# EAGLE board MJ828 - rev.3 - TCAN334 - poc (EAGLE 9.6.2)
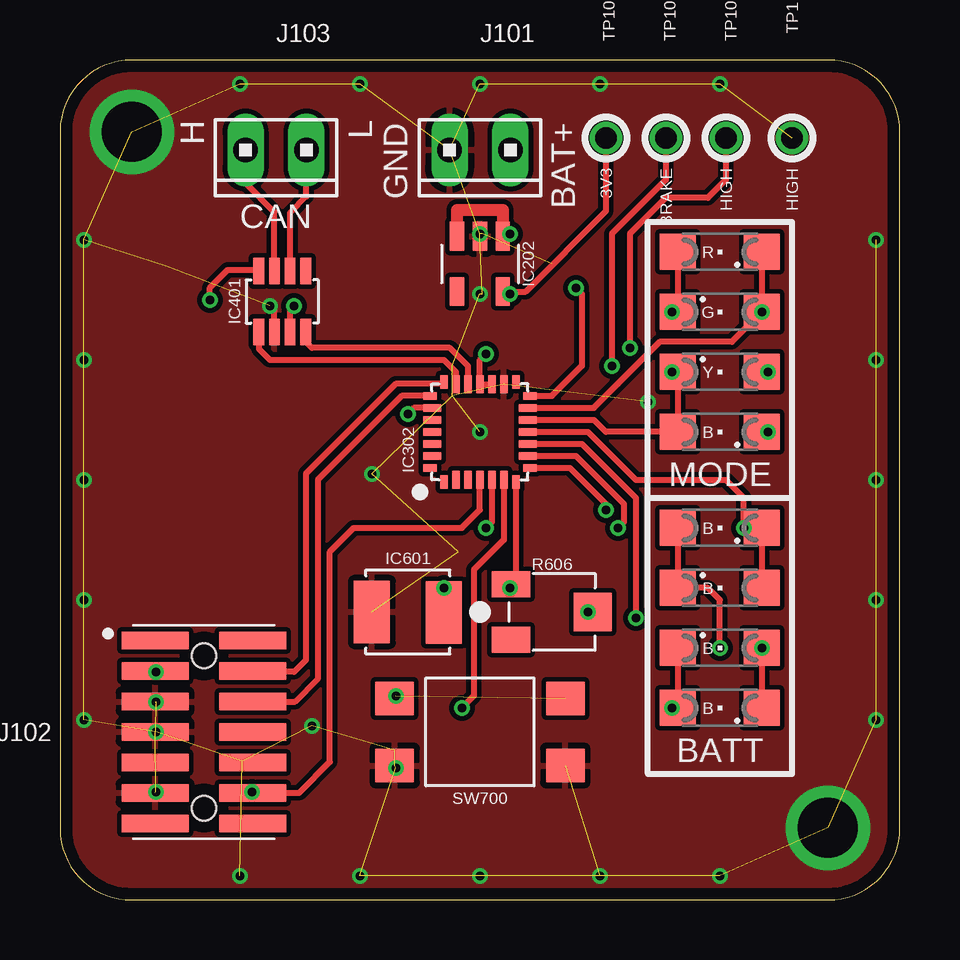
[diagram p0: board, top side]
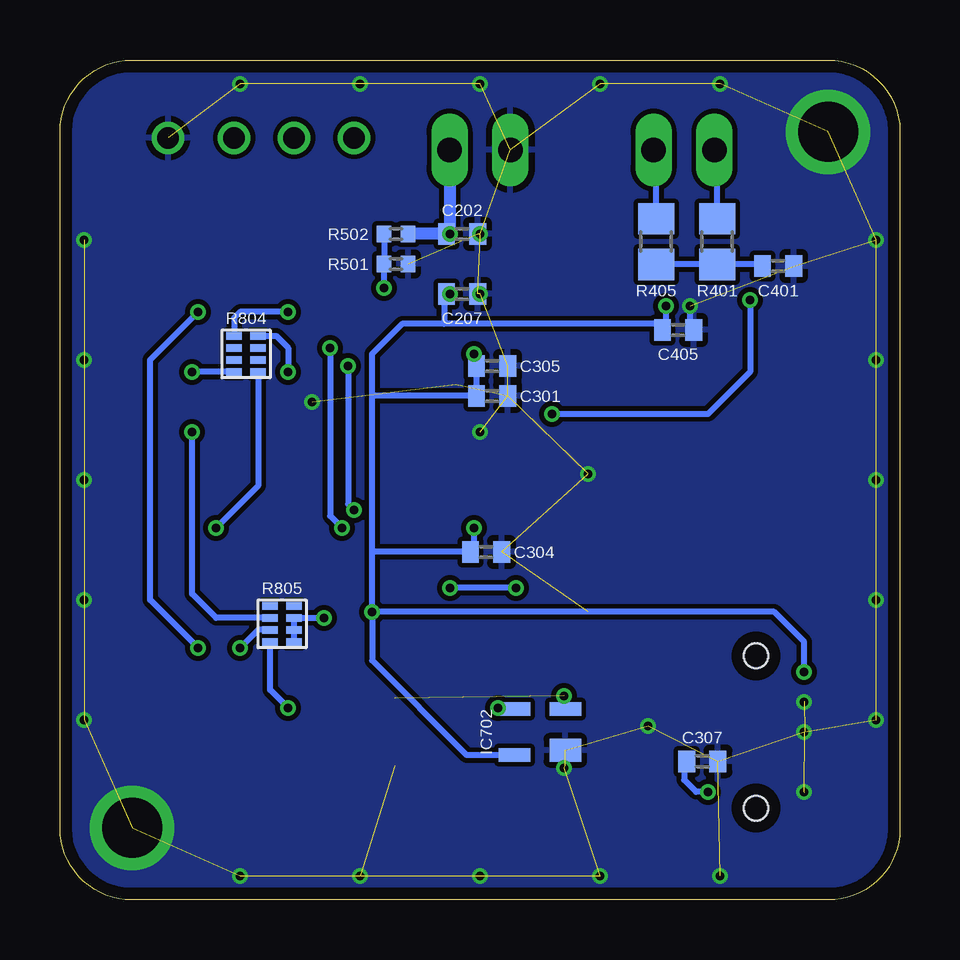
[diagram p1: board, bottom side, seen from below]

Size 35 x 35 mm. Coordinates in mm from the lower left corner, seen from the top.
Outline: 32,35 3,35 arc89 0,32.05 0,2.95 arc90 3,0 32,0 arc90 35,3 35,32 arc90 32,35
Copper layers (1*16): Top 0.035mm / dielectric 1.5mm / Bottom 0.035mm
Design rules "markovac_2layer": minimum track width 0.2mm, minimum drill 0.35mm, track to track 0.2mm, track to pad 0.2mm, pad to pad 0.2mm, via to via 0.2mm, smd to smd 0.2mm, copper to edge 0.5mm, drill to drill 8mil, minimum pad ring 0.15mm, minimum via ring 0.15mm, stop-mask expansion 4mil, vias tented up to drill 0.35mm, thermal gap 10mil
Net classes: 0 GND: width 0.25 mm, drill 0.35 mm, clearance 0.19 mm; 1 BAT+: width 0.5 mm, drill 0.35 mm, clearance 0.19 mm; 3 signal: width 0.25 mm, drill 0.35 mm, clearance 0.19 mm; 4 3V3: width 0.25 mm, drill 0.35 mm, clearance 0.19 mm

## Footprints (pad centres in the part's own frame; a part is rotated, then mirrored left to right if it is on the bottom)
C0402 = smd 0.7 x 0.9: 1 -0.65,0; 2 0.65,0
SOT-23-5L = smd 0.6 x 1.2: ADJ/NC -0.95,-1.15; EN -0.95,1.15; GND 0,1.15; IN 0.95,1.15; OUT 0.95,-1.15
UFQFPN-28 = smd 0.55 x 0.3: 1_PB8 -2.08,1.5; 7_PA1 -2.08,-1.5; 15_PB1 2.08,-1.5; 21_PA13 2.08,1.5 | smd 0.75 x 0.3: 2_PF0 -1.98,1; 3_PF1 -1.98,0.5; 4_NRST -1.98,0; 5_VDDA -1.98,-0.5; 6_PA0 -1.98,-1; 16_VSS 1.98,-1; 17_VDD 1.98,-0.5; 18_VDDIO2 1.98,0; 19_PA9-[PA11] 1.98,0.5; 20_PA10-[PA12] 1.98,1 | smd 0.3 x 0.55: 8_PA2 -1.5,-2.08; 14_PB0 1.5,-2.08; 22_PA14 1.5,2.08; 28_PB7 -1.5,2.08 | smd 0.3 x 0.75: 9_PA3 -1,-1.98; 10_PA4 -0.5,-1.98; 11_PA5 0,-1.98; 12_PA6 0.5,-1.98; 13_PA7 1,-1.98; 23_PA15 1,1.98; 24_PB3 0.5,1.98; 25_PB4 0,1.98; 26_PB5 -0.5,1.98; 27_PB6 -1,1.98
SOT23-8 = smd 0.45 x 1.1: P$1 -0.975,-1.275; P$2 -0.325,-1.275; P$3 0.325,-1.275; P$4 0.975,-1.275; P$5 0.975,1.275; P$6 0.325,1.275; P$7 -0.325,1.275; P$8 -0.975,1.275
P-LCC-2 = smd 2.6 x 1.5: COLLECTOR -0.02,-1.5; EMITTER 0,1.5
4SOT143 = smd 0.94 x 1.31: 1_GND -0.76,-1.06 | smd 0.55 x 1.31: 2_IN 0.96,-1.06; 3_OUT 0.96,1.06; 4_VCC -0.96,1.06
10X02MTA = drill 1.016 long: 1 1.27,0; 2 -1.27,0
FTSH10701LDVKA = smd 0.74 x 2.79: 1 -3.81,-2.035; 2 -3.81,2.035; 3 -2.54,-2.035; 4 -2.54,2.035; 5 -1.27,-2.035; 6 -1.27,2.035; 7 0,-2.035; 8 0,2.035; 9 1.27,-2.035; 10 1.27,2.035; 11 2.54,-2.035; 12 2.54,2.035; 13 3.81,-2.035; 14 3.81,2.035 | hole 1.02: -3.175,0; 3.175,0
SML1206 = smd 1.5 x 1.5: A 1.75,0; C -1.75,0
R0805 = smd 1.3 x 1.5: 1 -0.95,0; 2 0.95,0
R0402 = smd 0.6 x 0.7: 1 -0.5,0; 2 0.5,0
3313 = smd 1.1 x 1.6: 1_CCW 1.155,-1.7; 3_CW -1.155,-1.7 | smd 1.6 x 1.6: 2_WIPER 0,1.7
0402 = smd 0.65 x 0.3: 1 -0.5,-0.75; 2 0.5,-0.75; 3 -0.5,-0.25; 4 0.5,-0.25; 5 -0.5,0.25; 6 0.5,0.25; 7 -0.5,0.75; 8 0.5,0.75
SMD = smd 1.6 x 1.4: 1 -3.556,-1.397; 2 3.556,-1.397; 3 -3.556,1.397; 4 3.556,1.397
TH-0.9 = drill 0.9: P$1 0,0

## Placement (x,y rotation side)
C202  1uF / 10V  [C0402]  18.25,27.75 0 bottom
C207  1uF / 10V  [C0402]  18.25,25.25 180 bottom
C301  0.1uF / 10V  [C0402]  17,21 180 bottom
C304  1uF / 10V  [C0402]  17.25,14.5 180 bottom
C305  0.1uF / 10V  [C0402]  17,22.25 180 bottom
C307  0.1uF / 10V  [C0402]  8.24,5.78 180 bottom
C401  47nF / 10V  [C0402]  5.08,26.42 0 bottom
C405  0.1uF / 10V  [C0402]  9.25,23.75 0 bottom
IC202  LDK320AM33R  [SOT-23-5L]  17.5,26.5 0 top
IC302  STM32F042G6U6  [UFQFPN-28]  17.5,19.5 90 top
IC401  TCAN334  [SOT23-8]  9.26,24.94 0 top
IC601  SFH 320 FA-Z  [P-LCC-2]  14.5,12 90 top
IC702  MAX6816EUS+T  [4SOT143]  15,7 90 bottom
J101  Power Supply  [10X02MTA]  17.5,31.25 180 top
J102  FTSH-107-01-L-DV-K-A  [FTSH10701LDVKA]  6,7 270 top
J103  CAN  [10X02MTA]  9,31.25 180 top
LED_BATT801  156120BS82500  [SML1206]  27.5,15.5 180 top
LED_BATT802  156120BS82500  [SML1206]  27.5,13 0 top
LED_BATT803  156120BS82500  [SML1206]  27.5,10.5 0 top
LED_BATT804  156120BS82500  [SML1206]  27.5,8 180 top
LED_BLUE800  156120BS82500  [SML1206]  27.5,19.5 180 top
LED_GREEN800  156120VS82500  [SML1206]  27.5,24.5 0 top
LED_RED800  156120RS82500  [SML1206]  27.5,27 180 top
LED_YELLOW800  156120YS82500  [SML1206]  27.5,22 0 top
R401  60  [R0805]  7.62,27.43 90 bottom
R405  60  [R0805]  10.16,27.43 270 bottom
R501  100k 0.1%  [R0402]  21,26.5 180 bottom
R502  300k 0.1%  [R0402]  21,27.75 0 bottom
R606  3313J-1-104E - 100k  [3313]  20.5,12 270 top
R804  741X083151JP / 150Ω  [0402]  27.25,22.75 0 bottom
R805  741X083101JP / 100Ω  [0402]  25.75,11.5 0 bottom
SW700  TL3305CF160QG  [SMD]  17.5,7 180 top
TP1  CAN low  [TH-0.9]  30.5,31.75 0 top
TP102  CAN low  [TH-0.9]  22.75,31.75 0 top
TP104  CAN low  [TH-0.9]  25.25,31.75 0 top
TP105  CAN low  [TH-0.9]  27.75,31.75 0 top

## Library data of the parts
C202 C207 C301 C304 C305 C307 C401 C405 = rcl; SPICEPREFIX: C
IC202 = LDK320 5V LDO
IC302 = STM32F042G6
IC401 = TCAN33x - 3.3V CAN Transciever
IC601 = SFH 320 FA - IR Phototransistor
IC702 = MAX6818 CMOS Switch debouncer
J101 J103 = con-amp
J102 = STM32 JTAG 1.27mm 14pin header; DESCRIPTION: Headers & Wire Housings .050" Micro Terminal Strip; HEIGHT: 5.97mm; MANUFACTURER_NAME: SAMTEC; MANUFACTURER_PART_NUMBER: FTSH-107-01-L-DV-K-A; MOUSER_PART_NUMBER: 200-FTSH10701LDVKA; MOUSER_PRICE-STOCK: https://www.mouser.com/Search/Refine.aspx?Keyword=200-FTSH10701LDVKA
LED_BATT801-LED_BATT804 LED_BLUE800 LED_GREEN800 LED_RED800 LED_YELLOW800 = led
R401 R405 R501 R502 = rcl; SPICEPREFIX: R
R606 = 3313 - Trim Poti
R804 R805 = 741X083331JP Resistor Array
SW700 = TL3305-844809 SPST-NO Tact Switch
TP1 TP102 TP104 TP105 = signal testpoint

## Nets
3V3 [3V3]: C207.2 C301.2 C304.2 C305.2 C405.1 IC202.OUT IC302.5_VDDA IC302.17_VDD IC302.18_VDDIO2 IC401.P$3 IC702.4_VCC J102.3 R606.2_WIPER TP102.P$1
!STBY! [signal]: IC302.23_PA15 IC401.P$8
BAT+ [BAT+]: C202.1 IC202.EN IC202.IN J101.2 R502.2
BREAK_IN [signal]: IC302.8_PA2 TP104.P$1
CAN_H [signal]: IC401.P$7 J103.1 R401.2
CAN_INFRA:SPLIT [signal]: C401.1 R401.1 R405.2
CAN_L [signal]: IC401.P$6 J103.2 R405.1
CAN_RX [signal]: IC302.19_PA9-[PA11] IC401.P$4
CAN_TX [signal]: IC302.20_PA10-[PA12] IC401.P$1
CP1 [signal]: IC302.13_PA7 LED_BATT803.A LED_BATT804.C LED_GREEN800.A LED_RED800.C
CP2 [signal]: IC302.12_PA6 LED_BLUE800.A LED_YELLOW800.C R804.8
CP3 [signal]: IC302.11_PA5 LED_BATT801.C LED_BATT802.A R804.2
CP4 [signal]: IC302.10_PA4 R805.2 R805.4 R805.6
GND: C202.2 C207.1 C301.1 C304.1 C305.1 C307.1 C401.2 C405.2 IC202.GND IC302.16_VSS IC401.P$2 IC601.EMITTER IC702.1_GND J101.1 J102.5 J102.7 J102.11 R501.1 SW700.3 SW700.4 TP1.P$1
HIGH_IN [signal]: IC302.9_PA3 TP105.P$1
LED:D_BATT1&2 [signal]: LED_BATT801.A LED_BATT802.C R805.3
LED:D_BATT3&4 [signal]: LED_BATT803.C LED_BATT804.A R805.1
LED:D_BLUE [signal]: LED_BLUE800.C R805.5
LED:D_RED&GREEN [signal]: LED_GREEN800.C LED_RED800.A R804.7
LED:D_YELLOW [signal]: LED_YELLOW800.A R804.1
PHOTOTRANSISTOR: IC302.7_PA1 IC601.COLLECTOR R606.3_CW
PUSHBUTTON: IC302.6_PA0 IC702.3_OUT
PUSHBUTTON:SWITCH_IN: IC702.2_IN SW700.1 SW700.2
SYS_NRST [signal]: C307.2 IC302.4_NRST J102.12
SYS_SWCLK [signal]: IC302.22_PA14 J102.6
SYS_SWDIO [signal]: IC302.21_PA13 J102.4
VBAT+: IC302.14_PB0 R501.2 R502.1

## Tracks (layer width: path | path; a pad name or v marks a point on that pad's centre or on a via)
3V3  (via drill 0.35)
  Top 0.25: v9.75,24.75 9.58,24.59 IC401.P$3 | IC202.OUT 18.65,25.35 | 18.65,25.35 19.4,25.35 22.75,28.7 TP102.P$1 | 18.65,25.35 v18.75,25.25 | J102.3 v4,9.51 v4,9.5 | R606.2_WIPER v22,12 | IC302.17_VDD IC302.18_VDDIO2 17.5,22.5 v17.75,22.75 | IC302.5_VDDA 18,15.75 v17.75,15.5
  Bottom 0.25: v18.75,25.25 C207.2 19,25.15 19,24 | 19,24 20.75,24 22,22.75 22,21 | v22,12 22,14.5 | 22,14.5 22,21 | v22,12 22,9.98 18.06,6.04 IC702.4_VCC | v4,9.5 4,10.75 5.25,12 v22,12 | 22,14.5 C304.2 17.75,14.5 v17.75,15.5 | 22,21 C301.2 C305.2 17.65,22.65 v17.75,22.75 | v9.75,24.75 9.75,23.9 C405.1 10.15,24 19,24
!STBY!  (via drill 0.35)
  Top 0.25: v6.25,25 6.25,25.5 7,26.25 8.25,26.25 IC401.P$8 | IC302.23_PA15 14.75,20.5 v14.5,20.25
  Bottom 0.25: v14.5,20.25 8,20.25 6.25,22 v6.25,25
BAT+  (via drill 0.35)
  Top 0.5: IC202.EN 16.55,28.75 18.45,28.75 IC202.IN 18.55,27.75 v18.75,27.75
  Bottom 0.5: J101.2 18.77,27.77 v18.75,27.75 C202.1 R502.2
BREAK_IN  (via drill 0.35)
  Top 0.25: TP104.P$1 25.25,30 23,27.75 v23,22.25 | IC302.8_PA2 21.25,18 22.75,16.5 v22.75,16.25
  Bottom 0.25: v23,22.25 23,16.5 v22.75,16.25
CAN_H
  Top 0.25: IC401.P$7 8.93,28.66 7.73,29.86 J103.1
  Bottom 0.25: R401.2 7.62,31.14 J103.1
CAN_INFRA:SPLIT
  Bottom 0.25: C401.1 5.8,26.48 R401.1 R405.2
CAN_L
  Top 0.25: IC401.P$6 9.58,28.63 10.27,29.32 J103.2
  Bottom 0.25: R405.1 10.16,31.14 J103.2
CAN_RX
  Top 0.25: IC401.P$4 10.23,23.27 10.5,23 16.25,23 17,22.25 IC302.19_PA9-[PA11]
CAN_TX
  Top 0.25: IC401.P$1 8.28,22.96 8.75,22.5 16,22.5 16.5,22 IC302.20_PA10-[PA12]
CP1  (via drill 0.35)
  Top 0.25: LED_RED800.C LED_GREEN800.A 28,23.25 25,23.25 23.25,21.5 22.25,20.5 IC302.13_PA7 | LED_BATT803.A LED_BATT804.C
  Bottom 0.25: LED_BATT803.A 31.25,12.5 31.25,22.5 LED_GREEN800.A
  other vias: 29.25,24.5 29.25,10.5
CP2  (via drill 0.35)
  Top 0.25: v25.5,22 LED_YELLOW800.C LED_BLUE800.A 22.75,19.5 22.25,20 IC302.12_PA6
  Bottom 0.25: R804.8 26,23.5 25.5,23 v25.5,22
CP3  (via drill 0.35)
  Top 0.25: LED_BATT802.A LED_BATT801.C v28.5,15.5 28.5,16.75 27.75,17.5 24,17.5 22,19.5 IC302.11_PA5
  Bottom 0.25: R804.2 26.75,17.25 v28.5,15.5
CP4  (via drill 0.35)
  Top 0.25: v24,11.75 24,16.75 21.75,19 IC302.10_PA4
  Bottom 0.25: R805.2 R805.4 R805.6 v24,11.75
GND  (via drill 0.35, 2.5)  (51 unrouted)
  Top 0.25: IC401.P$2 8.93,24.57 v8.75,24.75
  Bottom 0.25: C405.2 8.75,23.9 v8.75,24.75
  other vias: 3,32 32,3 17.5,25.25 14,5.5 34,17.5 1,17.5 1,12.5 1,7.5 1,22.5 1,27.5 17.5,1 22.5,1 27.5,1 12.5,1 7.5,1 34,12.5 34,7.5 34,22.5 34,27.5 17.5,34 22.5,34 27.5,34 12.5,34 7.5,34 17.5,27.75 4,8.25 4,7 4,4.5 13,17.75 17.5,19.5 10.5,7.25 24.5,20.75
  pour Top (rank 6): 0,35 35,35 35,0 0,0
  pour Bottom (rank 6): 0,35 35,35 35,0 0,0
HIGH_IN  (via drill 0.35)
  Top 0.25: v23.75,23 23.75,27.75 25.25,29.25 27,29.25 27.75,30 TP105.P$1 | IC302.9_PA3 21.5,18.5 23.5,16.5 23.5,15.75 v23.25,15.5
  Bottom 0.25: v23.75,23 23.75,16 v23.25,15.5
LED:D_BATT1&2  (via drill 0.35)
  Top 0.25: LED_BATT801.A LED_BATT802.C 27,13 27.5,12.5 v27.5,10.5
  Bottom 0.25: R805.3 26.75,11.25 v27.5,10.5
LED:D_BATT3&4  (via drill 0.35)
  Top 0.25: LED_BATT803.C LED_BATT804.A v25.5,8
  Bottom 0.25: v25.5,8 26.25,8.75 R805.1
LED:D_BLUE  (via drill 0.35)
  Top 0.25: LED_BLUE800.C v29.5,19.5
  Bottom 0.25: R805.5 28.5,11.75 29.5,12.75 v29.5,19.5
LED:D_RED&GREEN  (via drill 0.35)
  Top 0.25: LED_RED800.A LED_GREEN800.C v25.5,24.5
  Bottom 0.25: v25.5,24.5 27.5,24.5 27.75,24.25 R804.7
LED:D_YELLOW  (via drill 0.35)
  Top 0.25: LED_YELLOW800.A v29.5,22
  Bottom 0.25: R804.1 v29.5,22
PHOTOTRANSISTOR  (via drill 0.35)
  Top 0.25: IC302.7_PA1 19,13.36 R606.3_CW 18.8,13.05 v18.75,13 | IC601.COLLECTOR v16,13
  Bottom 0.25: v16,13 v18.75,13
PUSHBUTTON  (via drill 0.35)
  Top 0.25: IC302.6_PA0 18.5,15 17.25,13.75 17.25,8.5 v16.75,8
  Bottom 0.25: IC702.3_OUT 16.1,8 v16.75,8
PUSHBUTTON:SWITCH_IN  (via drill 0.35)  (1 unrouted)
  Top 0.25: SW700.2 14,8.45 v14,8.5
  Bottom 0.25: IC702.2_IN 13.94,8.44 v14,8.5
SYS_NRST  (via drill 0.35)
  Top 0.25: v8,4.5 J102.12 9.96,4.46 11.25,5.75 11.25,14.5 12.25,15.5 16.75,15.5 17.5,16.25 IC302.4_NRST
  Bottom 0.25: v8,4.5 8.5,4.5 9,5 9,5.67 C307.2
SYS_SWCLK
  Top 0.25: J102.6 9.79,8.27 10.75,9.23 10.75,17.5 14.25,21 IC302.22_PA14
SYS_SWDIO
  Top 0.25: J102.4 8.07,9.5 9.76,9.5 10.25,9.99 10.25,17.75 14,21.5 15.92,21.5 IC302.21_PA13
VBAT+  (via drill 0.35)
  Top 0.25: v21.5,25.5 21.75,25.25 21.75,22.25 20.5,21 IC302.14_PB0
  Bottom 0.25: R502.1 R501.2 v21.5,25.5

## Text on the board
tPlace: H | L | GND | BAT+ | 3V3 | BRAKE | HIGH | HIGH | CAN | R | G | Y | B | MODE | B | B | B | B | BATT
tStop: MJ828 POC / ejovrh rev.3a